# Altium PCB Board_Final.PcbDoc
Units mil, origin at the board's own origin, x right, y up, seen from the top; angles counter-clockwise.
Board outline 5593.76 x 2194.62 mil, 2 copper layers (Top Layer, Bottom Layer); 47 components, 44 nets, 216 pads, 73 vias.
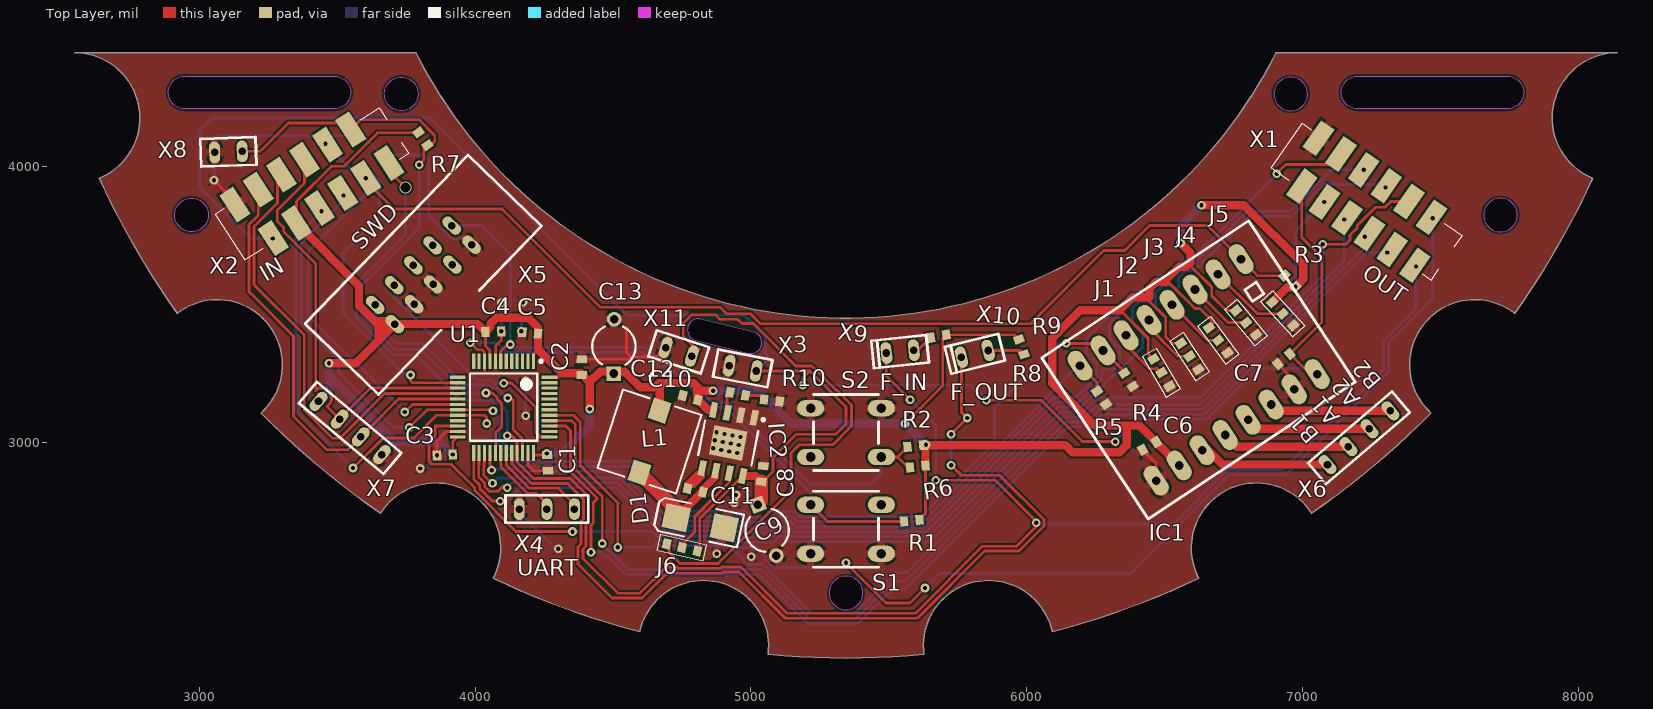
[diagram p0: Top Layer view]
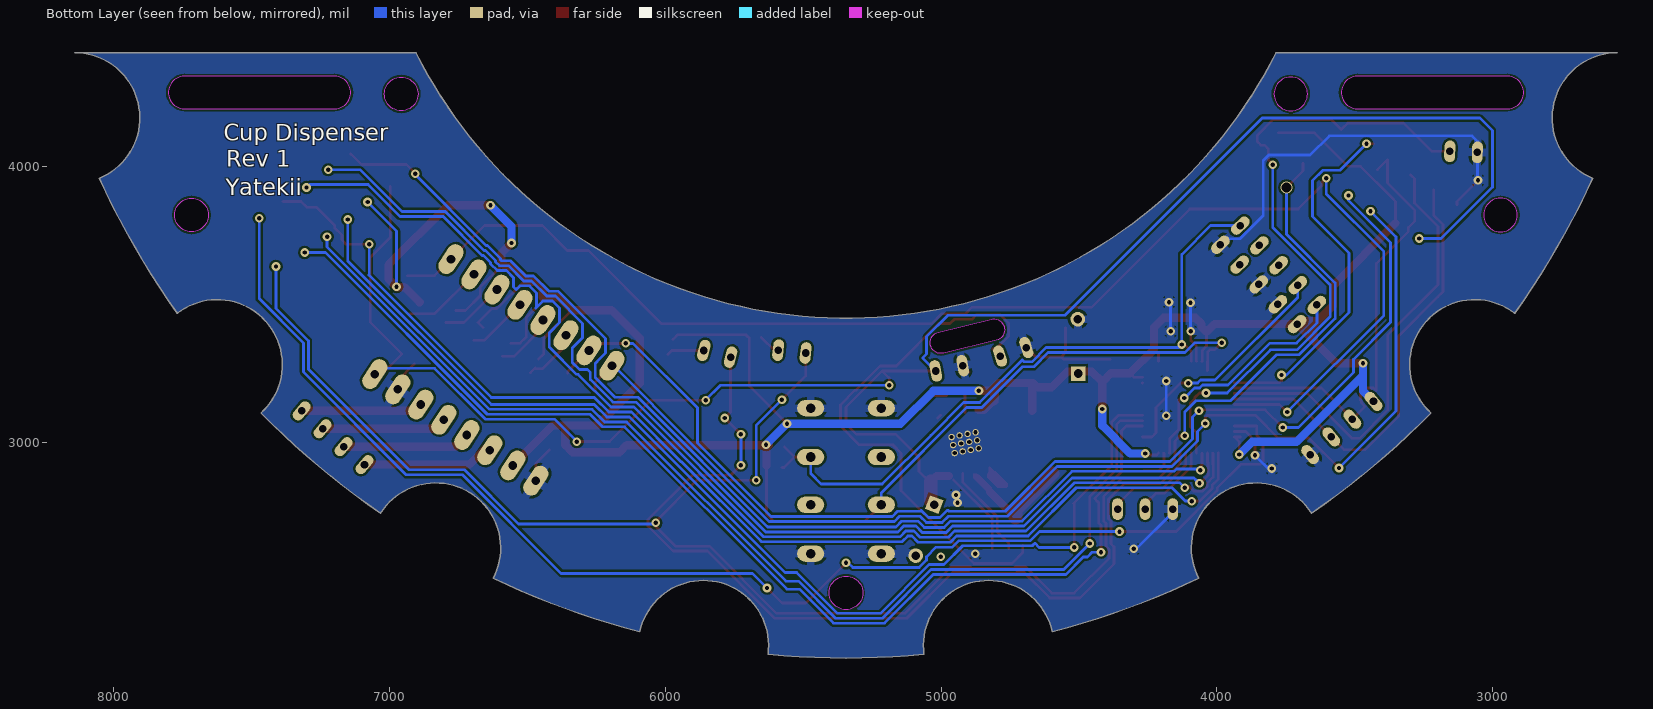
[diagram p1: Bottom Layer view, seen from below]

## Layer stack, top to bottom
Top Solder: solder mask 0.4, Solder Resist, Dk 3.5
Top Layer: signal copper 1.4
Dielectric 1: dielectric 12.6, FR-4, Dk 4.8
Bottom Layer: signal copper 1.4
Bottom Solder: solder mask 0.4, Solder Resist, Dk 3.5

## Board outline
3223.86,3107.03 ccw(c5345,5195) 3657.09,2743.51 cw(c3856.81,2617.38) 4065.91,2507.48 ccw(c5345,5195) 4597.34,2314.06 cw(c4828.16,2263.84) 5062.23,2232.08 ccw(c5345,5195) 5627.77,2232.08 cw(c5861.84,2263.84) 6092.66,2314.06 ccw(c5345,5195) 6624.09,2507.48 cw(c6833.19,2617.38) 7032.91,2743.51 ccw(c5345,5195) 7466.14,3107.03 cw(c7625.04,3281.82) 7769.58,3468.66 ccw(c5345,5195) 8052.34,3958.42 cw(c8141.88,4177.02) 8141.88,4413.24 6904.08,4413.24 cw(c5345,5195) 3785.92,4413.24 2548.12,4413.24 cw(c2548.12,4177.02) 2637.66,3958.42 ccw(c5345,5195) 2920.42,3468.66 cw(c3064.96,3281.82)
cut-out: 2946.99,4209.99 cw(c2946.99,4269.05) 2946.99,4328.1 3490.17,4328.1 cw(c3490.17,4269.05) 3490.17,4209.99
cut-out: 3732.28,4202.87 cw(c3732.28,4263.9) 3671.26,4263.9 cw(c3732.28,4263.9) 3732.28,4324.92 cw(c3732.28,4263.9) 3793.31,4263.9 cw(c3732.28,4263.9)
cut-out: 4799.9,3370.57 4991.18,3324.04 ccw(c5000.48,3362.3) 5009.79,3400.55 4818.52,3447.08 ccw(c4809.21,3408.82)
cut-out: 2971.95,3763.9 cw(c2971.95,3824.92) 2910.93,3824.92 cw(c2971.95,3824.92) 2971.95,3885.94 cw(c2971.95,3824.92) 3032.98,3824.92 cw(c2971.95,3824.92)
cut-out: 5283.98,2454.84 ccw(c5345,2454.84) 5345,2393.82 ccw(c5345,2454.84) 5406.02,2454.84 ccw(c5345,2454.84) 5345,2515.86 ccw(c5345,2454.84)
cut-out: 6896.69,4263.9 ccw(c6957.72,4263.9) 6957.72,4202.87 ccw(c6957.72,4263.9) 7018.74,4263.9 ccw(c6957.72,4263.9) 6957.72,4324.92 ccw(c6957.72,4263.9)
cut-out: 7199.83,4209.99 cw(c7199.83,4269.05) 7199.83,4328.1 7743.01,4328.1 cw(c7743.01,4269.05) 7743.01,4209.99
cut-out: 7657.02,3824.92 ccw(c7718.05,3824.92) 7718.05,3763.9 ccw(c7718.05,3824.92) 7779.07,3824.92 ccw(c7718.05,3824.92) 7718.05,3885.94 ccw(c7718.05,3824.92)

## Design rules (kind name [scope] priority, off if disabled: settings)
Clearance [All] p1: gap=7.87
ComponentClearance [All] p1 off: gap=5 collisioncheckmode=3 verticalgap=7.87 showdistances=FALSE
PlaneConnect [All] p1: planeconnectstyle=Relief reliefexpansion=20 reliefentries=4 reliefconductorwidth=30 reliefairgap=10
PolygonConnect [InComponent('IC2')] p1: connectstyle=Direct reliefconductorwidth=10 reliefentries=4 polygonreliefangle="90 Angle" airgapwidth=10
PolygonConnect PolygonConnect_1 [All] p2: connectstyle=Relief reliefconductorwidth=30 reliefentries=4 polygonreliefangle="90 Angle" airgapwidth=10
RoutingVias [All] p1: holewidth=35.43 width=23.62 viastyle="Through Hole" minholewidth=15.75 minwidth=23.62 maxholewidth=35.43 maxwidth=43.31
SolderMaskExpansion [All] p1: expansion=4
UnpouredPolygon [All] p1: allowunpoured=FALSE
Width [All] p1: maxlimit=100 minlimit=10 preferedwidth=10
27 further rules are at their usual default settings.

## Classes and differential pairs
component class FillLevelSensor: R8 R9 X9 X10
component class Power: C8 C9 C10 C11 C12 C13 D1 IC2 J6 L1 R10 X11
component class Schematic: C1 C2 C3 C4 C5 C6 C7 IC1 J1 J2 J3 J4 J5 R1 R2 R3 R4 R5 R6 R7 S1 S2 U1 X1 X2 X3 X4 X5 X6 X7 X8

## Components (designator, comment, footprint, x,y, rotation, side; value= is the part's Value field where it differs from the comment)
C1 "Cap" "Res 0603" 4262.96,2926.46 r92.68 top
C2 "Cap" "Res 0603" 4386.91,3273.36 r268.96 top
C3 "Cap" "Res 0603" 3890.34,2955.03 r3.28 top
C4 "Cap" "Res 0603" 4066.08,3402.03 r182.28 top
C5 "Cap" "Res 0603" 4199.75,3397.32 r354.95 top
C6 "Cap" "Res 0603" 6445.38,2987.97 r30.24 top
C7 "Cap" "Res 0603" 6932.73,3302.81 r40 top
C8 "Cap" "Res 0603" 5041.09,2886.58 r262.5 top
C9 "Cap2" CAPR5-4X5 5058.69,2682.13 r290 top
C10 "Cap" "Res 0603" 4952.57,3176.1 r169 top
C11 "Cap" "Res 0603" 4798.21,2826.59 r347 top
C12 "Cap" "Res 0603" 4780.8,3162.36 r344.49 top
C13 "Cap2" CAPR5-4X5 4503.53,3348.57 r89.5 top
D1 "D Schottky" SMB 4816.71,2709.59 r168 top
IC1 "A4988 Stepper" "A4988 Stepper" 6623.58,3263.28 r33.5 top
IC2 "IFX91041EJV50" IFX91041EJV50 4918.01,2998.32 r259 top
J1 "VCC to GND Jumper" "VCC to GND Jumper" 6488.76,3253.29 r120.5 top
J2 "VCC to GND Jumper" "VCC to GND Jumper" 6590.98,3312.52 r123.5 top
J3 "VCC to GND Jumper" "VCC to GND Jumper" 6694.82,3370.82 r126.5 top
J4 "VCC to GND Jumper" "VCC to GND Jumper" 6795.96,3434.85 r129.5 top
J5 "VCC to GND Jumper" "VCC to GND Jumper" 6928.64,3466.76 r132.5 top
J6 "VCC to GND Jumper" "VCC to GND Jumper" 4750.39,2619.45 r347 top
L1 "22 µH" "WE-PD 7345 Plastic Base" 4632.8,3003.08 r72 top
R1 "10k" "Res 0603" 5583.63,2716.7 r5.5 top
R2 "10k" "Res 0603" 5596.54,2987.24 r6.5 top
R3 "10k" "Res 0603" 6955.2,3584.8 r315 top
R4 "10k" "Res 0603" 6369.21,3227.52 r122.5 top
R5 "10k" "Res 0603" 6271.36,3162.28 r124.5 top
R6 "10k" "Res 0603" 5605.01,2912.92 r6.5 top
R7 "10k" "Res 0603" 3811.65,4101.27 r125.5 top
R8 "10k" "Res 0603" 5680.34,3385.66 r10.5 top
R9 "10k" "Res 0603" 5981.27,3347.15 r109 top
R10 "22k" "Res 0603" 5076.03,3152 r172.5 top
S1 "Taster" TASTER 5345,2685.56 r90 top
S2 "Taster" TASTER 5345,3035.95 r270 top
U1 "STM32F042C6T6" LQFP48 4103.23,3128.35 r270 top
X1 "OUT" "12p Wurth 690 367 28 12 76" 7232.92,3873.07 r325 top
X2 "IN" "12p Wurth 690 367 28 12 76" 3408.8,3937.62 r33 top
X3 "2p Connector" "2p 2.54 pitch" 4970.59,3268.85 r349 top
X4 "UART" "3p 2.54 pitch" 4260.26,2758.64 r180 top
X5 "Wannenstecker 10p" "Wannenstecker 10p" 3812.38,3607.92 r46 top
X6 "4p Connector" "4p 2.54 pitch Motor Connector" 7204.87,3017.37 r40.5 top
X7 "LEDs" "4p 2.54 pitch" 3547.22,3052.49 r320 top
X8 "2p Connector" "2p 2.54 pitch" 3105.56,4053.95 r182 top
X9 "2p Connector" "2p 2.54 pitch, diode" 5541.05,3329.69 r6 top
X10 "2p Connector" "2p 2.54 pitch, diode" 5812.08,3321.65 r14 top
X11 "2p Connector" "2p 2.54 pitch" 4738.65,3328.84 r342 top

## Footprints (in the part's own frame and the unit in brackets; to place one, negate y for a bottom-side part, rotate by r counter-clockwise, add the part's x,y. Pads: shape width x height; smd on the part's side, far side on the other; paste and mask are expansions set on the pad)
"2p 2.54 pitch" [mm]
  oval 1x2 hole 0.7: 1(1.27,0) 2(-1.27,0)
  silkscreen extent -2.54,-1.27 2.54,1.27
"2p 2.54 pitch, diode" [mm]
  oval 1x2 hole 0.7: 1(1.27,0) 2(-1.27,0)
  silkscreen extent -2.54,-1.27 2.54,1.27
"3p 2.54 pitch" [mm]
  oval 1x2 hole 0.7: 1(2.54,0) 2(0,0) 3(-2.54,0)
  silkscreen extent -3.81,-1.27 3.81,1.27
"4p 2.54 pitch" [mm]
  oval 1x2 hole 0.7: 1(3.81,0) 2(1.27,0) 3(-1.27,0) 4(-3.81,0)
  silkscreen extent -5.08,-1.27 5.08,1.27
"4p 2.54 pitch Motor Connector" [mm]
  oval 1x2 hole 0.7: 1(3.81,0) 2(1.27,0) 3(-1.27,0) 4(-3.81,0)
  silkscreen extent -5.08,-1.27 5.08,1.27
"12p Wurth 690 367 28 12 76" [mm]
  rect 1.5x3 smd: 1(-5.715,-2.25) 2(-6.985,2.25) 3(-3.175,-2.25) 4(-4.445,2.25) 5(-0.635,-2.25) 6(-1.905,2.25) 7(1.905,-2.25) 8(0.635,2.25) 9(4.445,-2.25) 10(3.175,2.25) 11(6.985,-2.25) 12(5.715,2.25)
  silkscreen extent -9,-2.5 9,2.5
"A4988 Stepper" [mm] "Stepper Driver"
  oval 1.5x3 hole 0.8: 1(8.89,6.35) 2(6.35,6.35) 3(3.81,6.35) 4(1.27,6.35) 5(-1.27,6.35) 6(-3.81,6.35) 7(-6.35,6.35) 8(-8.89,6.35) 9(-8.89,-6.35) 10(-6.35,-6.35) 11(-3.81,-6.35) 12(-1.27,-6.35) 13(1.27,-6.35) 14(3.81,-6.35) 15(6.35,-6.35) 16(8.89,-6.35)
  silkscreen extent -11.43,-8.89 11.43,8.89
CAPR5-4X5 [mm] "Capacitor; 2 Leads"
  rect 1.35x1.35 hole 0.8: 1(-2.5,0)
  round 1.35 hole 0.8: 2(2.5,0)
  silkscreen extent -1.69,-2 1.82,2
IFX91041EJV50 [mm] "IFX91041EJV50, Buck Converter, max in 40V, fixed out 5V"
  rect 1.45x0.6 smd: 1(-2.725,1.905) 2(-2.725,0.635) 3(-2.725,-0.635) 4(-2.725,-1.905) 5(2.725,-1.905) 6(2.725,-0.635) 7(2.725,0.635) 8(2.725,1.905)
  round 0.6 hole 0.4: 9(-0.75,0.25) 9(-0.75,-1.25) 9(-0.75,-0.5) 9(-0.75,1) 9(0,0.25) 9(0,-1.25) 9(0,-0.5) 9(0,1) 9(0.75,0.25) 9(0.75,-0.5) 9(0.75,-1.25) 9(0.75,1)
  rect 2.75x3.1 smd: 9(0,0)
  silkscreen extent -2.85,-2.5 1.6,2.88, body extent -2,-2.5 2,2.5, height 1.7
LQFP48 [mm] "LQFP, 48-Leads, Body 7.00x7.00mm, STM32F042C6T6"
  rect 1.45x0.3 smd: 1(-4.225,2.75) 2(-4.225,2.25) 3(-4.225,1.75) 4(-4.225,1.25) 5(-4.225,0.75) 6(-4.225,0.25) 7(-4.225,-0.25) 8(-4.225,-0.75) 9(-4.225,-1.25) 10(-4.225,-1.75) 11(-4.225,-2.25) 12(-4.225,-2.75) 25(4.225,-2.75) 26(4.225,-2.25) 27(4.225,-1.75) 28(4.225,-1.25) 29(4.225,-0.75) 30(4.225,-0.25) 31(4.225,0.25) 32(4.225,0.75) 33(4.225,1.25) 34(4.225,1.75) 35(4.225,2.25) 36(4.225,2.75)
  rect 0.3x1.45 smd: 13(-2.75,-4.225) 14(-2.25,-4.225) 15(-1.75,-4.225) 16(-1.25,-4.225) 17(-0.75,-4.225) 18(-0.25,-4.225) 19(0.25,-4.225) 20(0.75,-4.225) 21(1.25,-4.225) 22(1.75,-4.225) 23(2.25,-4.225) 24(2.75,-4.225) 37(2.75,4.225) 38(2.25,4.225) 39(1.75,4.225) 40(1.25,4.225) 41(0.75,4.225) 42(0.25,4.225) 43(-0.25,4.225) 44(-0.75,4.225) 45(-1.25,4.225) 46(-1.75,4.225) 47(-2.25,4.225) 48(-2.75,4.225)
  silkscreen extent -4.35,-3.1 3.1,3.58, body extent -3.5,-3.5 3.5,3.5, height 1.6
"Res 0603" [mm] "Chip Resistor, 2-Leads, 0603, IPC Medium Density"
  rect 0.75x0.95 smd: 1(-0.725,0) 2(0.725,0)
  body extent -0.85,-0.45 0.85,0.45, height 0.55
SMB [mm] "DO-214-AA/SMB; 2 C-Bend Leads; Body 5.3 x 3.6 mm, inc. leads (LxW)"
  rect 2.3x2.3 smd: 1(-2.25,0) 2(2.25,0)
  silkscreen extent -3.8,-1.55 4.1,1.55
TASTER [mm]
  oval 1.5x2.5 hole 0.9: 1(2.25,3.25) 2(-2.25,3.25) 3(-2.25,-3.25) 4(2.25,-3.25)
  silkscreen extent -3.5,-3 3.5,3
"VCC to GND Jumper" [mm]
  rect 0.75x0.95 smd: 1(-1.45,0) 2(1.45,0) 3(0,0)
  silkscreen extent -2.18,-0.75 2.18,0.75
"Wannenstecker 10p" [mm] "Connector, 10p"
  oval 1x2 hole 0.7: 1(-5.08,-1.27) 2(-5.08,1.27) 3(-2.54,-1.27) 4(-2.54,1.27) 5(0,-1.27) 6(0,1.27) 7(2.54,-1.27) 8(2.54,1.27) 9(5.08,-1.27) 10(5.08,1.27)
  silkscreen extent -10.8,-4.7 10.8,4.7
"WE-PD 7345 Plastic Base" [mm] "SMD Inductor, 2-Leads, Body 7,3x7,3mm"
  rect 2x1.7 smd: 1(-3,0) 2(3,0)
  silkscreen extent -3.8,-3.8 3.8,3.8, body extent -3.65,-3.65 3.65,3.65, height 4.09

## Part data
C1 C2 C3 C4 C5 C6 C7 C8 C9 C10 C11 C12 C13: "Capacitor"
D1: "Schottky Diode"
L1: library part "WE-PD 7345, M Plastic Base, 7447779122", "SMD-Shielded Power Inductor WE-PD, L=22 µH"
R1 R2 R3 R4 R5 R6 R7 R8 R9 R10: library part Res
X1 X2: library part "12p Connector"
X4: library part "3p Connector"
X7: library part "4p Connector"

## Via types
v1: diameter 31.5, hole 15.75, Top Layer to Bottom Layer, 72 vias
v2: diameter 43.31, hole 35.43, Top Layer to Bottom Layer, 1 vias

## Nets (pads, with @x,y where several pads share a name; then routed paths per layer and width w, separated by ;. In a path a pad name is that pad's centre, name@x,y a point inside that pad or via, vN(x,y) a via of type N, cw(c..) or ccw(c..) an arc to the next point about the centre after c; other vN are vias at no path point)
1A_1: IC1.12 X6.3 | length 464.5
  Top Layer w30: IC1.12 6762.18,2984.9 X6.3
1B_1: IC1.11 X6.4 | length 484.1
  Top Layer w10: IC1.11 6646.37,2981.91 IC1.11@6648.61,2981.91
  Top Layer w30: IC1.11@6648.61,2981.91 6710.57,2919.95 X6.4
2A_1: IC1.13 X6.2 | length 407.1
  Top Layer w30: IC1.13@6835.82,3049.84 X6.2
2B_1: IC1.14 X6.1 | length 409.5
  Top Layer w30: IC1.14@6909.45,3114.79 X6.1
5V: C1.2 C2.2 C3.2 C4.2 C5.2 C6.2 C12.2 C13.1 IC1.10 IC2.4 J1.2 J2.2 J3.2 J4.2 J5.2 L1.2 R1.2 R2.2 R3.2 R6.2 R7.2 R8.2 R9.2 U1.1 U1.9 U1.24 U1.36 U1.48 X1.3 X2.3 X5.1 X7.4 | length 10995.8
  Top Layer w10: X2.3 3352.21,3874.22 3366.27,3888.29 3366.27,3888.49 3479.29,4001.5 3524.89,4001.5 3646.34,4122.95 R7.2@3777.03,4122.95 ; U1.24@3915.15,3020.09 U1.24 3918.84,3002.03 v1(3918.84,2956.66) ; C4.2 4037.56,3349.71 4053.12,3334.16 4053.12,3295.6 U1.9 ; U1.36 4218.54,2954.97 C1.2 4261.71,2954.89 4261.71,2958.29 v1(4260,2960) ; U1.1 4211.5,3321.32 4228.18,3338 ; U1.48 4300.5,3236.62 4315.03,3251.15 ; v1(4863.04,3187.48) v1@4864.86,3185.66 ; v1(5558.83,3068.17) 5695.41,3204.75 5695.41,3377.86 R8.2 5955.25,3390.86 R9.2 ; R1.2 5633.37,2740.77 R6.2 ; R2.2 R2.2@5633.37,2982 ; 6339.04,3479.91 6440.8,3378.14 6440.8,3321.45 J1.2 ; 6444.19,3512.97 6504.39,3452.77 6504.39,3382.8 6527.06,3360.13 J2.2 ; C6.2@6470.04,2999.87 C6.2 ; 6505.81,3590.3 6610.39,3485.72 6628.16,3485.72 6679.02,3434.86 J3.2 ; IC1.10 IC1.10@6576.45,2893.47 ; 6593.81,3652.63 6593.81,3640.51 6671.17,3563.16 6671.17,3531.98 6724.25,3478.9 J4.2 ; R3.2@6974.09,3563.33 R3.2
  Top Layer w30: X2.3 3579.14,3568.31 3579.14,3496.36 3634.57,3440.94 3697.8,3440.94 X5.1 ; v1(3470.21,3287.2) 3567.29,3287.2 3650.72,3370.63 ; 3660.97,3420.41 3678.41,3402.97 3678.41,3398.32 ; v1(4415.59,3121.69) 4415.59,3218.83 ; L1.2 4669.3,3200 ; C12.2@4806.12,3156.91 4806.12,3201.47 ; C12.2@4807.1,3148.58 4807.1,3174.47 4820.11,3187.48 ; C12.2 4845.08,3117.95 IC2.4 ; v1(4863.04,3187.48) 4820.11,3187.48 ; R2.2 6140.03,2990.47 6165.91,2964.59 6336.84,2964.59 6362.63,2990.38 6362.63,3061.49 ; R6.2 R2.2@5633.37,2982 ; 6505,3582.01 6469.33,3582.01 6444.19,3556.87 6444.19,3526.81 6385.94,3526.81 6339.04,3479.91 6195.15,3479.91 6093.34,3378.1 6093.34,3214.27 6246.12,3061.49 6362.63,3061.49 ; 6505.81,3590.3 6552.72,3637.2 6578.38,3637.2 6593.81,3652.63 6593.81,3687.69 v1(6558.05,3723.45) ; IC1.10 6470.04,2999.87 6408.42,3061.49 6362.63,3061.49 ; v1(6634.22,3859.98) 6787.75,3859.98 7003.06,3644.66 7003.06,3592.3 R3.2 ; J5.2 6892.1,3508.84 6946.58,3563.33 R3.2@6974.09,3563.33 ; 3650.72,3370.63 3650.72,3424.04 3645.44,3429.32 X5.1 ; 3650.72,3370.63 3678.41,3398.32 ; 3678.41,3398.32 X5.1 ; X5.1 4009.13,3429.32 C4.2 4056.23,3419.56 4056.23,3430.74 4077.71,3452.21 4193.78,3452.21 4228.18,3417.81 C5.2 4228.18,3338 4315.03,3251.15 4383.27,3251.15 4415.59,3218.83 ; 4415.59,3218.83 4454.34,3257.58 4542.5,3257.58 4599.72,3200.36 4651.37,3200.36 ; 4651.37,3200.36 4651.72,3200 4669.3,3200 ; 4651.37,3200.36 4666.47,3215.46 4669.3,3215.46 ; 4669.3,3200 4669.3,3215.46 ; 4669.3,3215.46 4792.13,3215.46 4806.12,3201.47 ; 4806.12,3201.47 4820.11,3187.48
  Bottom Layer w10: v1(6974.68,3565.32) 6974.68,3767.17 v1(7079.71,3872.2)
  Bottom Layer w30: X7.4 3470.21,3186.8 3470.21,3243.29 ; v1(3470.21,3287.2) 3470.21,3243.29 ; v1(3918.84,2956.66) 3873.13,3002.38 3711.12,3002.38 3470.21,3243.29 ; v1(4260,2960) 4314.76,2960 4415.59,3060.83 v1(4415.59,3121.69) ; v1(4863.04,3187.48) 5028.3,3187.48 5147.6,3068.17 v1(5558.83,3068.17) v1(5635.03,2991.97) ; v1(6558.05,3723.45) 6558.05,3783.81 v1(6634.22,3859.98)
/EN_1: IC1.1 R3.1 U1.18 X2.9 | length 5061.9
  Top Layer w10: v1(3603.81,3958.64) 3618.83,3943.62 3618.83,3932.9 3705.36,3846.36 4098.21,3846.36 4454.52,3490.06 4889.22,3490.06 4912.34,3466.94 4998.49,3466.94 5034.99,3430.43 6013.07,3430.43 6279.06,3696.42 6355.69,3696.42 6445.81,3786.54 6655.84,3786.54 IC1.1 6837.39,3604.99 R3.1 ; v1(3745.45,3110.42) 3773.22,3138.2 U1.18
  Bottom Layer w10: v1(3603.81,3958.64) 3603.81,3902 3394.89,3693.08 3394.89,3460.98 v1(3745.45,3110.42)
/EN_2: U1.39 X1.9 | length 4124.3
  Top Layer w10: U1.39 4328.8,3059.46 4345.66,3042.6 4345.66,2894.06 4443.41,2796.31 4428.57,2781.47 4428.57,2708.37 4420.2,2700 v1(4420.2,2602.33)
  Bottom Layer w10: v1(4420.2,2602.33) 4452.1,2602.33 4469.43,2585 4484.63,2585 4547.98,2521.65 5028.72,2521.65 5205.48,2344.9 5390.54,2344.9 5513.74,2468.1 5559,2468.1 6147.75,3056.85 6227.1,3056.85 6272.76,3102.51 6645.8,3102.51 7232.2,3688.92 v1(7307.76,3688.92)
BLANK_1: U1.16 X2.6 | length 1635.8
  Top Layer w10: X2.6 3283.59,3956.99 3283.59,3867.97 3198.54,3782.92 3198.54,3571.98 3380.98,3389.54 3380.98,3117.69 3483.65,3015.02 3509.26,3015.02 3671.81,3177.57 U1.16
BLANK_2: U1.27 X1.6 | length 4104.4
  Top Layer w10: U1.27 4034.34,2928.8 4032.53,2926.99 4032.53,2912.34 4031.29,2911.1 4031.29,2882.25 4061.49,2852.04 v1(4063.48,2852.04)
  Bottom Layer w10: v1(4063.48,2852.04) 4063.74,2852.04 4075,2863.3 ; 5638.75,2678.12 5636.57,2675.94 5156.62,2675.94 5135.59,2696.97 5091.36,2696.97 5068.46,2674.06 4981.6,2674.06 4958.7,2696.97 4699.36,2696.97 4524.8,2871.53 4083.24,2871.53 4075,2863.3 ; 5638.78,2678.12 6106.89,3146.22 6190.08,3146.22 6272.1,3228.24 6272.1,3254.48 6282.57,3264.95 6311.73,3264.95 6337.61,3290.84 6337.61,3342.38 6300.02,3379.97 6300.02,3431.89 6398.98,3530.84 6430.09,3530.84 6485.28,3586.04 6513.48,3586.04 6568.67,3641.23 6601.86,3641.23 6615.7,3655.07 6615.7,3660.06 6652.06,3696.42 6657.06,3696.42 6798.07,3837.44 6954.69,3837.44 7105.9,3988.65 v1(7222.29,3988.65) ; 4075,2863.3 4071.83,2860.12 4074.33,2857.61 4075,2858.28 4075,2863.3
DIR_1: IC1.8 R5.2 U1.20 X2.5 | length 4354.8
  Top Layer w10: X2.5 3447.43,3838.35 v1(3443.05,3838.35) ; v1(3557.65,2907.29) 3667.08,3016.72 3778.19,3016.72 3860.29,3098.83 U1.20 4033.65,3098.83 4042.05,3090.43 v1(4042.05,3068.77) ; IC1.8 6255.2,3217.11 R5.2
  Bottom Layer w10: v1(3443.05,3838.35) 3350.54,3745.84 3350.54,3114.4 v1(3557.65,2907.29) ; v1(4042.05,3068.77) 4070.55,3040.27 4070.55,3005.34 4162.48,2913.41 4579.31,2913.41 4760.01,2732.71 4973.51,2732.71 4996.41,2709.81 5053.65,2709.81 5076.56,2732.71 5150.4,2732.71 5169.25,2713.86 5623.98,2713.86 5901.36,2991.25 ; 5901.36,2991.28 6188.65,3278.57 IC1.8
DIR_2: U1.41 X1.5 | length 4068.5
  Top Layer w10: U1.41 4356.71,3098.83 4381.4,3074.13 4381.4,2916.98 4520,2778.38 4517.71,2776.1 v1(4517.71,2619.6) ; v1(7151.59,3808.75) X1.5@7157.68,3814.84
  Bottom Layer w10: v1(4517.71,2619.6) 4644.82,2619.6 4660.22,2635 4669.75,2625.47 4921.6,2625.47 4989.67,2557.4 5043.53,2557.4 5220.28,2380.65 5375.73,2380.65 5523.78,2528.7 5566.36,2528.7 6130.26,3092.6 6212.29,3092.6 6257.95,3138.26 6630.99,3138.26 7151.59,3658.86 v1(7151.59,3808.75)
EST_1: R7.1 U1.29 X2.12 X8.2 | length 2393.7
  Top Layer w10: X8.2@3161.99,4055.69 3220.56,4055.69 3323.34,4158.47 3525.23,4158.47 X2.12 3585.36,4170.56 3796.75,4170.56 3853.93,4113.38 3853.93,4091.87 3840.08,4078.03 R7.1 3813.65,4063.46 3813.65,4023.67 v1(3797.65,4007.68) ; v1(4039.87,3179.73) 4063.51,3179.73 4080.29,3162.95 4080.29,3157.54 4097.15,3140.69 4097.15,3058.58 4074.61,3036.04 4074.61,2962.92 U1.29
  Bottom Layer w10: v1@3790.76,4007.68 v1(3797.65,4007.68) 3797.65,3779.87 3589.14,3571.36 3589.14,3456.73 3709.76,3336.12 3806.39,3336.12 3962.79,3179.73 v1(4039.87,3179.73)
EST_2: U1.22 X1.12 | length 4909.1
  Top Layer w10: U1.22 3855.69,3059.46 3855.69,3025.12 3833.16,3002.6 3833.16,2930.69 3842.85,2921 3913.22,2921 3999.11,2835.11 3999.11,2825.38 4147.43,2677.06 4215.77,2677.06 4215.73,2677.02 v1(4353.14,2677.02) ; v1(5345,2563.51) 5490.76,2417.75 5576.72,2417.75 v1(5631.18,2472.21)
  Bottom Layer w10: v1(4353.14,2677.02) 4643.48,2677.02 4677.15,2643.34 4936.49,2643.34 4959.39,2620.44 5017.98,2620.44 5052.91,2585.51 5052.91,2573.3 5079.64,2546.57 5320.19,2546.57 5337.13,2563.51 v1(5345,2563.51) ; v1(5631.18,2472.21) 5684.33,2525.36 6378,2525.36 6735.88,2883.24 6940.06,2883.24 7312.28,3255.46 7312.28,3361.22 7472.71,3521.65 v1(7472.71,3813.25)
FILLED: U1.33 X1.11 X2.11 X9.2 | length 6937.4
  Top Layer w10: X2.11 3687.68,3984.55 v2(3747.74,3924.48) ; v1(4117.05,3024.6) 4133.14,3024.6 4152.45,3005.29 U1.33 4153.35,2962.01 4153.35,2928.14 4212.04,2869.45 4344.99,2869.45 4410.7,2803.74 4410.7,2715.78 4402.32,2707.4 4402.32,2624.93 4391.58,2614.18 4391.58,2579.61 4517.56,2453.62 4598.5,2453.62 4693.11,2548.23 4731.69,2548.23 4736.17,2543.74 4888.96,2543.74 4893.44,2548.23 4964.42,2548.23 5132,2380.65 5596.49,2380.65 5839.9,2624.05 5963.99,2624.05 6036.66,2696.72 6036.66,2711.91 5885.15,2863.43 v1(5670.69,2863.43) ; X9.2 5491.33,3241.5 v1(5577.38,3155.44) ; X1.11 v1(7412.02,3638.13)
  Bottom Layer w10: v2(3747.74,3924.48) 3747.74,3755.23 3571.27,3578.76 3571.27,3449.33 3702.36,3318.24 3784.64,3318.24 3951.78,3151.1 4051.72,3151.1 4052,3151.38 4075.3,3151.38 4117.05,3109.63 v1(4117.05,3024.6) ; v1(5577.38,3155.44) 5670.69,3062.14 v1(5670.69,2863.43) ; v1(6034.56,2708.53) 6038.57,2704.52 6531.89,2704.52 6728.47,2901.11 6929.91,2901.11 7294.41,3265.61 7294.41,3368.63 7412.02,3486.24 v1(7412.02,3638.13)
GND: C1.1 C2.1 C3.1 C4.1 C5.1 C6.1 C7.1 C8.1 C9.2 C12.1 C13.2 D1.1 IC1.9 IC1.15 IC2.1 IC2.2 IC2.9 J1.1 J2.1 J3.1 J4.1 J5.1 R4.1 R5.1 R10.1 S1.2 S1.3 S2.2 S2.3 U1.8 U1.23 U1.35 U1.47 X1.2 X2.2 X3.2 X4.1 X5.3 X5.5 X5.9 X7.1 X8.1 X11.2 | length 3312.5
  Top Layer w10: v1(3053.16,3950.63) 3129.92,3873.88 X2.2 ; v1(3861.85,2953.25) C3.1 3861.85,3006 3895.61,3039.77 U1.23 U1.23@3935.99,3038.87 ; U1.8 4074.61,3295.6 4074.61,3349.92 4094.61,3369.91 v1(4094.61,3403.16) ; v1(4167.99,3403.16) C5.1 ; v1(4183.75,3096.98) v1@4183.75,3100.05 ; U1.35@4192.72,2961.11 U1.35 4191.82,2916.2 4210.07,2897.95 C1.1 ; U1.47 U1.47@4270.48,3216.03 ; C2.1 4555.92,3301.9 4564.34,3310.33 ; 4549.03,3416.01 4549.03,3325.64 4564.34,3310.33 ; X11.2 4657.13,3310.33 4564.34,3310.33 ; v1@4875.42,2595.96 v1(4876.31,2596.85) ; X3.2@4898.95,3255.83 X3.2 ; v1@4940.57,2778.22 v1(4940.57,2781.45) ; v1@4945.77,2809.28 v1(4946.42,2809.93) ; IC2.1@5002.56,3098.87 IC2.1 ; S2.3@5183.09,3124.53 S2.3 ; S1.2@5206.1,2586.02 S1.2 ; C6.1 6469.7,2924.62 IC1.9 ; C7.1 6970.03,3225.3 IC1.15
  Bottom Layer w10: v1(3053.16,3950.63) 3055.59,3953.06 X8.1 3055.59,4092.14 3075.46,4112.01 3592.33,4112.01 3662.13,4042.21 3811.95,4042.21 3832.18,4021.98 3832.18,3823.07 3916.57,3738.67 3965.66,3738.67 X5.9 ; v1(3800.84,2905.69) 3800.84,2892.24 v1(3861.85,2953.25) ; v1(4094.61,3403.16) 4095.87,3404.43 v1(4095.87,3506.9) ; X4.1 4160.26,2746.77 4292.81,2614.23 v1(4301.77,2614.23) ; v1(4167.99,3403.16) 4167.99,3503.18 v1(4173.93,3509.12) ; v1(4183.26,3222.76) 4183.75,3222.26 v1(4183.75,3096.98) ; v1(4876.31,2596.85) v1@4881,2596.85
  other v1: 5001.52,2586.02
NetC10_1: C10.1 R10.2 | length 73.3
  Top Layer w10: C10.1 5032.81,3170.65 R10.2
NetC10_2: C10.2 IC2.3 | length 77.5
  Top Layer w10: IC2.3 4913.94,3170.94 C10.2
NetC11_1: C11.1 IC2.5 | length 36.9
  Top Layer w10: IC2.5@4812.53,2895.93 IC2.5 IC2.5@4823.92,2886.53
NetC11_2: C11.2 D1.2 IC2.6 L1.1 | length 352.3
  Top Layer w10: L1.1@4596.3,2888.82 L1.1 ; C11.2@4822.23,2820.17 C11.2
  Top Layer w30: D1.2 C11.2@4822.23,2820.17
  Top Layer w50: L1.1@4596.3,2888.82 4730.06,2755.06 D1.2
NetIC1_2: IC1.2 J5.3 | length 293.8
  Top Layer w10: IC1.2 6837.04,3466.76 J5.3
NetIC1_3: IC1.3 J4.3 | length 234.9
  Top Layer w10: IC1.3 6730.37,3434.85 J4.3
NetIC1_4: IC1.4 J3.3 | length 220.8
  Top Layer w10: IC1.4 6655.82,3370.82 J3.3
NetIC1_5: IC1.5 J2.3 | length 216.9
  Top Layer w10: IC1.5 6443.9,3418.01 6549.39,3312.52 J2.3
NetIC1_6: IC1.6 J1.3 | length 209.2
  Top Layer w10: IC1.6 6360.51,3352.7 6445.83,3267.39 6472.2,3267.39 6472.2,3269.84 J1.3
NetIC2_7: IC2.7 J6.3 | length 342.4
  Top Layer w10: J6.3@4754.66,2615.17 4754.66,2633.73 4796.64,2675.7 4796.64,2730.89 4922.08,2856.34 IC2.7
NetJ6_1: J6.1 X11.1 | length 1986.1
  Top Layer w10: J6.1@4704.02,2626.71 4704.02,2601.17 4743.58,2561.62 4881.55,2561.62 5145.24,2825.31 5145.24,2961.66 5175.48,2991.89 5297.73,2991.89 5365,3059.16 5365,3136.67 5311.92,3189.75 5308.91,3189.75 5221.48,3277.18 5162.97,3277.18 5009.02,3431.13 4968.14,3431.13 4952.56,3446.72 4888.52,3446.72 4871.71,3463.53 4786.55,3463.53 4754.5,3431.49 4754.5,3386.16 4800.6,3340.06 4812.87,3340.06 X11.1
NetR8_1: R8.1 X9.1 | length 80.4
  Top Layer w10: X9.1 5606.73,3334.91 R8.1
NetR9_1: R9.1 X10.1 | length 135.6
  Top Layer w10: X10.1 5976.98,3333.74 R9.1
NON: U1.32 X10.2 | length 3453.7
  Top Layer w10: U1.32 4133.67,2962.02 4133.67,2922.55 4204.64,2851.58 4335.36,2851.58 4392.82,2794.11 4392.82,2723.18 4384.45,2714.81 4384.45,2632.33 4373.7,2621.59 4373.7,2559.1 4497.05,2435.75 4605.91,2435.75 4700.31,2530.15 4724.49,2530.15 4728.77,2525.87 4896.36,2525.87 4900.64,2530.15 4957.22,2530.15 5124.6,2362.77 5603.9,2362.77 5847.3,2606.18 5972.68,2606.18 6063.18,2696.68 6063.18,2720.39 5902.27,2881.3 5762.74,2881.3 v1(5726.04,2918) ; v1(5726.04,3030.06) v1(5784.58,3088.6) 5763.56,3109.61 X10.2
  Bottom Layer w10: v1(5726.04,2918) v1(5726.04,3030.06)
NRST: R2.1 R6.1 S2.1 S2.4 U1.7 X5.10 | length 2474.3
  Top Layer w10: U1.7 4093.39,3331.23 4117.37,3355.2 v1(4127.26,3355.2) ; S2.1 5531.54,2947.37 ; R2.1 5531.54,2947.37 ; R6.1 5569.22,2909.69 5531.54,2947.37
  Bottom Layer w10: X5.10@3911.76,3786.56 4023.01,3786.56 4127.26,3682.31 v1(4127.26,3355.2) 4138.01,3344.45 4619.26,3344.45 4671.28,3292.43 4698.74,3292.43 4705.75,3299.44 4860.21,3144.99 4918.28,3144.99 5037.3,3025.97 5213.98,2849.29 5435.19,2849.29 5472.95,2887.06 S2.1
S1: R1.1 S1.1 S1.4 U1.10 | length 2033.1
  Top Layer w10: v1(3983.04,3362.06) 4008.98,3336.11 4025.89,3336.11 4033.43,3328.57 4033.43,3262.63 4035.24,3260.82 4035.24,3293.79 U1.10 ; S1.1 5277.22,2713.97 R1.1
  Bottom Layer w10: v1(3983.04,3362.06) 4079.93,3362.06 4115.41,3326.58 4611.85,3326.58 4663.88,3274.55 4705.37,3274.55 4852.8,3127.12 4907.57,3127.12 5217.05,2817.64 S1.1
SPI1_MOSI: U1.17 X2.4 X7.2 | length 1623.9
  Top Layer w10: X2.4 3213.78,3823.45 3180.67,3790.33 3180.67,3546.62 3198.54,3528.75 3341.98,3385.31 3341.98,3093.91 3461.81,2974.08 3539.25,2974.08 X7.2 3723.05,3157.88 U1.17
SPI1_SCK: U1.15 X2.8 X7.3 | length 1651.8
  Top Layer w10: X2.8@3417.76,3989.28 X2.8 3381.52,3940.62 3282.41,3841.51 3282.41,3803.13 3305.98,3779.56 3305.98,3765.06 3422.01,3649.03 3422.01,3187.45 3432.65,3198.09 3459.09,3198.09 3479.07,3178.11 3479.07,3152.63 3475.44,3149 3475.44,3143.19 3462.9,3130.65 X7.3 3621.54,3197.25 U1.15
SPI1_XLAT: U1.14 X2.10 | length 1343.4
  Top Layer w10: X2.10@3431.79,4083.21 v1(3457.56,4083.21) ; v1(3765.76,3244.8) 3765.76,3224.21 3773.03,3216.94 U1.14
  Bottom Layer w10: v1(3457.56,4083.21) 3553.52,3987.26 3615.67,3987.26 3653.35,3949.57 3653.35,3819.68 3520.97,3687.29 3520.97,3471.2 3747.38,3244.8 v1(3765.76,3244.8)
SPI2_MOSI: U1.28 X1.4 | length 3978.9
  Top Layer w10: U1.28 4054.02,2919.36 4067.02,2906.36 v1(4059.91,2899.25) v1@4065,2904.34 ; v1(6906.75,3974.83) 6906.26,3974.83 6939.18,4007.74 7102.11,4007.74 X1.4
  Bottom Layer w10: v1(4059.91,2899.25) 4059.91,2899.91 4060,2900 4060,2897.96 4067.02,2904.98 4065,2907 4065.4,2907.4 4069.03,2903.78 4146.83,2903.78 4155.08,2895.53 4526.07,2895.53 4706.77,2714.84 4966.1,2714.84 4989.01,2691.93 5061.05,2691.93 5083.96,2714.84 5143,2714.84 5164.03,2693.81 5629.17,2693.81 5631.35,2695.99 ; 5631.38,2695.99 6099.48,3164.09 6182.68,3164.09 6254.22,3235.64 6254.22,3287.19 6238.39,3303.03 6238.57,3303.21 6216.63,3325.15 6216.63,3376.69 6388.66,3548.72 6422.69,3548.72 6477.88,3603.91 6506.07,3603.91 6561.27,3659.1 6594.46,3659.1 6597.83,3662.47 6597.83,3667.47 6644.66,3714.3 6649.65,3714.3 6906.75,3971.39 v1(6906.75,3974.83)
SPI2_SCK: U1.26 X1.8 | length 4280.2
  Top Layer w10: 4014.65,2873.61 4013.41,2874.84 4013.41,2918.5 4014.65,2919.74 U1.26 U1.26@4015.56,2961.11 ; 4015.56,2872.7 4034.86,2853.4 4034.86,2840.19 4051.62,2823.42 4083.51,2823.42 4101.47,2841.38 4112.2,2841.38 v1(4117.19,2836.39)
  Bottom Layer w10: v1(4117.19,2836.39) 4134.45,2853.66 4517.4,2853.66 4691.96,2679.09 4951.29,2679.09 4974.2,2656.19 5075.86,2656.19 5098.77,2679.09 5128.19,2679.09 5149.22,2658.06 5643.97,2658.06 5646.15,2660.24 ; 5646.19,2660.24 6114.29,3128.35 6197.48,3128.35 6316.21,3247.08 6322.05,3247.08 6421,3346.03 6421,3397.58 6383.41,3435.17 6383.41,3487.08 6409.3,3512.97 6444.19,3512.97 6469.3,3487.86 6469.66,3487.86 6466.8,3490.73 6466.8,3542.27 6492.69,3568.16 6527.58,3568.16 6540.83,3554.92 6550.19,3564.28 6550.19,3597.47 6576.08,3623.35 6609.27,3623.35 6633.58,3647.66 6633.58,3652.66 6659.46,3678.55 6664.46,3678.55 6805.48,3819.56 6962.1,3819.56 7077.73,3935.2 7290.57,3935.2 v1(7301.01,3924.75)
SPI2_XLAT: U1.25 X1.10 | length 4239.9
  Top Layer w10: U1.25 3994.97,2868.01 4016.98,2845.99 4016.98,2832.78 4062.26,2787.5 v1(4091.74,2787.5) ; v1(7073.57,3718.66) 7156.92,3718.66 7172.61,3734.35 7172.61,3751.99 7198.69,3778.07 7198.69,3786.47 7265.33,3853.11 7299.85,3853.11 7320.68,3873.93 X1.10
  Bottom Layer w10: v1(4091.74,2787.5) 4115.04,2787.5 4163.32,2835.78 4509.99,2835.78 4684.56,2661.22 4943.89,2661.22 4966.8,2638.31 5083.26,2638.31 5106.17,2661.22 5120.79,2661.22 5141.82,2640.19 5651.38,2640.19 5653.56,2642.37 ; 5653.59,2642.37 5941.45,2930.22 5942.6,2930.22 6122.85,3110.47 6204.89,3110.47 6257.94,3163.53 6630.98,3163.53 7075.3,3607.84 7073.57,3609.57 v1(7073.57,3718.66)
STEP_1: IC1.7 R4.2 U1.19 X2.7 | length 4400.4
  Top Layer w10: X2.7 3528.61,3895.51 v1(3523.18,3895.51) ; v1(3760.99,3054.34) 3825.17,3118.51 U1.19 3937.51,3119.13 4072.9,3119.13 4068.78,3115 v1(4065,3115) ; v1(6143.12,3359.44) 6229.56,3359.44 6255.23,3333.76 IC1.7 6353.87,3257.02 R4.2
  Bottom Layer w10: v1(3523.18,3895.51) 3523.18,3878 3370.32,3725.14 3370.32,3435.92 3504.74,3301.5 3504.74,3253.5 3703.9,3054.34 v1(3760.99,3054.34) ; v1(4065,3115) 4066.2,3115 4088.42,3092.78 4088.42,3012.74 4169.88,2931.28 4586.72,2931.28 4767.41,2750.59 4971.81,2750.59 4974.62,2753.4 4978.1,2753.4 5003.82,2727.68 5046.25,2727.68 ; 5071.97,2753.4 5046.25,2727.68 ; v1(6143.12,3359.44) 6117.06,3359.44 5883.49,3125.87 5883.49,2998.65 5616.57,2731.74 5176.66,2731.74 5157.8,2750.59 5069.15,2750.59 5046.25,2727.68
STEP_2: U1.40 X1.7 | length 4044.1
  Top Layer w10: U1.40 4349.94,3079.14 4363.53,3065.55 4363.53,2901.47 4461.28,2803.71 v1(4461.28,2633.62)
  Bottom Layer w10: v1(4461.28,2633.62) 4555.38,2539.53 5036.13,2539.53 5212.88,2362.77 5383.14,2362.77 5517.7,2497.34 5562.96,2497.34 6140.35,3074.72 6219.69,3074.72 6265.36,3120.39 6638.39,3120.39 7226.56,3708.55 v1(7226.56,3745.71)
SWCLK: U1.37 X5.4 | length 871.5
  Top Layer w10: v1(4104.49,3215.43) 4132.47,3215.43 4220.86,3127.03 4220.86,3035.39 4236.17,3020.09 U1.37 U1.37@4269.57,3020.99
  Bottom Layer w10: X5.4 3706.95,3525.92 4006.65,3226.22 4059.13,3226.22 4069.92,3215.43 v1(4104.49,3215.43)
SWDIO: U1.34 X5.2 | length 893.7
  Top Layer w10: v1@4115.11,3164.7 v1(4118.37,3161.45) 4130.84,3161.45 4138.37,3153.92 4138.37,3046.93 4171.23,3014.08 4171.23,2962.92 U1.34 U1.34@4173.04,2961.11
  Bottom Layer w10: X5.2 3637.48,3433.67 3711.04,3360.12 3807.67,3360.12 3959.44,3208.35 4051.72,3208.35 4062.52,3197.56 4080.76,3197.56 4116.87,3161.45 v1(4118.37,3161.45)
UART_RX: U1.31 X4.3 | length 367.3
  Top Layer w10: U1.31 4113.08,2917.86 4197.23,2833.7 4302.25,2833.7 4360.26,2775.69 X4.3
UART_TX: U1.30 X4.2 | length 299
  Top Layer w10: U1.30 4093.39,2922.34 4094.02,2921.71 4094.02,2911.63 4189.83,2815.83 4221.88,2815.83 4247.08,2790.63 4247.08,2758.64 X4.2
VMOT: C7.2 C8.2 C9.1 IC1.16 IC2.8 J6.2 X1.1 X2.1 X3.1 | length 7391.4
  Top Layer w10: J6.2@4814.51,2616.11 4814.51,2723.49 4954.76,2863.74 ; X3.1 5214.07,3259.31 ; C9.1 C9.1@5037.36,2786.95 ; C8.2@5027.22,2848.13 C8.2 5043.12,2858.28 5080.28,2895.44 5080.28,2945.67 5164.17,3029.56 5307.11,3029.56 5345,3067.45 5345,3128.38 5214.07,3259.31 ; v1(5188.58,3207.45) 5188.58,3233.81 5214.07,3259.31 ; v1(5853.99,3153.56) 6051.68,3153.56 6202.02,3003.21 v1(6320.85,3003.21) ; X1.1 6997.8,3742.54 7070.32,3670.02 7070.32,3436.88 C7.2 7027.77,3247.98 IC1.16
  Top Layer w30: IC2.8 5016.94,2878.7 C8.2
  Top Layer w50: C9.1@5037.36,2786.95 C8.2
  Bottom Layer w10: v1(3266.81,3739.83) 3187.23,3739.83 3001.26,3925.8 3001.26,4131.7 3046.56,4177.01 3835.76,4177.01 4551.36,3461.41 4975.74,3461.41 5053.07,3384.08 5053.07,3320.55 5066.99,3306.62 X3.1 ; v1(5188.58,3207.45) 5800.1,3207.45 v1(5853.99,3153.56) ; v1(6320.85,3003.21) 6402.27,3084.64 6653.2,3084.64 6837.4,3268.84 7032.57,3268.84 IC1.16
pads on no net: U1.2 U1.3 U1.4 U1.5 U1.6 U1.11 U1.12 U1.13 U1.21 U1.38 U1.42 U1.43 U1.44 U1.45 U1.46 X5.6 X5.7 X5.8

## Polygon pours and split planes (outlines as drawn)
GND on Top Layer "Top Layer-No Net1" (solid, pour order 11): 3223.86,3107.03 ccw(c5345,5195) 3657.09,2743.51 cw(c3856.81,2617.38) 4065.91,2507.48 ccw(c5345,5195) 4597.34,2314.06 cw(c4828.16,2263.84) 5062.23,2232.08 ccw(c5345,5195) 5627.77,2232.08 cw(c5861.84,2263.84) 6092.66,2314.06 ccw(c5345,5195) 6624.09,2507.48 cw(c6833.19,2617.38) 7032.91,2743.51 ccw(c5345,5195) 7466.14,3107.03 cw(c7625.04,3281.82) 7769.58,3468.66 ccw(c5345,5195) 8052.34,3958.42 cw(c8141.88,4177.02) 8141.88,4413.24 6904.08,4413.24 cw(c5345,5195) 3785.92,4413.24 2548.12,4413.24 cw(c2548.12,4177.02) 2637.66,3958.42 ccw(c5345,5195) 2920.42,3468.66 cw(c3064.96,3281.82)
GND on Bottom Layer "Top Layer-GND" (solid, pour order 10): 3223.86,3107.03 ccw(c5345,5195) 3657.09,2743.51 cw(c3856.81,2617.38) 4065.91,2507.48 ccw(c5345,5195) 4597.34,2314.06 cw(c4828.16,2263.84) 5062.23,2232.08 ccw(c5345,5195) 5627.77,2232.08 cw(c5861.84,2263.84) 6092.66,2314.06 ccw(c5345,5195) 6624.09,2507.48 cw(c6833.19,2617.38) 7032.91,2743.51 ccw(c5345,5195) 7466.14,3107.03 cw(c7625.04,3281.82) 7769.58,3468.66 ccw(c5345,5195) 8052.34,3958.42 cw(c8141.88,4177.02) 8141.88,4413.24 6904.08,4413.24 cw(c5345,5195) 3785.92,4413.24 2548.12,4413.24 cw(c2548.12,4177.02) 2637.66,3958.42 ccw(c5345,5195) 2920.42,3468.66 cw(c3064.96,3281.82)

## Other copper
Top Layer:
  region net NetC11_1: 4802.06,2895.93 4824.71,2895.93 4833.39,2887.26 4833.39,2872.3 4796.37,2835.28 4762.95,2835.28 4757.91,2840.32 4757.91,2851.79
  region net NetC11_2: 4882.88,2886.87 4871.65,2886.87 4861.84,2882.8 4816.25,2837.21 4816.25,2810.4 4823.52,2810.4 4882.88,2869.76

## Silkscreen, mask and mechanical layers (free items; w line width, h text height)
Top Overlay:
  text "SWD" at 3586.49,3693.09 h60 r45
  text "OUT" at 7211.28,3601.04 h60 r325
  text "IN" at 3241.68,3581.07 h60 r30
  text "F_IN" at 5467.67,3189.3 h60
  text "F_OUT" at 5723.39,3153.4 h60
  text "UART" at 4152.98,2517.67 h60
Bottom Overlay:
  text "Cup Dispenser" at 7600.47,4094.93 h60
  text "Rev 1" at 7591.99,4000.25 h60
  text "Yatekii" at 7593.25,3896.97 h60
Mechanical 1:
  circle w0.5: c7718.05,3824.92 r61.02
  circle w0.5: c5345,2454.84 r61.02
  circle w0.5: c2971.95,3824.92 r61.02
  circle w0.5: c3732.28,4263.9 r61.02
  circle w0.5: c6957.72,4263.9 r61.02
  lines w0.5: 2548.12,4413.24 cw(c2548.12,4177.02) 2637.66,3958.42 ccw(c5345,5195) 2920.42,3468.66 cw(c3064.96,3281.82) 3223.86,3107.03 ccw(c5345,5195) 3657.09,2743.51 cw(c3856.81,2617.38) 4065.91,2507.48 ccw(c5345,5195) 4597.34,2314.06 cw(c4828.16,2263.84) 5062.23,2232.08 ccw(c5345,5195) 5627.77,2232.08 cw(c5861.84,2263.84) 6092.66,2314.06 ccw(c5345,5195) 6624.09,2507.48 cw(c6833.19,2617.38) 7032.91,2743.51 ccw(c5345,5195) 7466.14,3107.03 cw(c7625.04,3281.82) 7769.58,3468.66 ccw(c5345,5195) 8052.34,3958.42 cw(c8141.88,4177.02) 8141.88,4413.24 6904.08,4413.24 cw(c5345,5195) 3785.92,4413.24 2548.12,4413.24 ; 2946.99,4209.99 cw(c2946.99,4269.05) 2946.99,4328.1 3490.17,4328.1 cw(c3490.17,4269.05) 3490.17,4209.99 2946.99,4209.99 ; 4799.9,3370.57 cw(c4809.21,3408.82) 4818.52,3447.08 5009.79,3400.55 cw(c5000.48,3362.3) 4991.18,3324.04 4799.9,3370.57 ; 7199.83,4209.99 cw(c7199.83,4269.05) 7199.83,4328.1 7743.01,4328.1 cw(c7743.01,4269.05) 7743.01,4209.99 7199.83,4209.99

## Text inside footprints (layer, text, board x,y; h text height)
X6: Top Overlay "B1" at 7063.89,3028.47 h60 r130.5; Top Overlay "A1" at 7139.93,3093.41 h60 r130.5; Top Overlay "A2" at 7215.97,3158.35 h60 r130.5; Top Overlay "B2" at 7292.01,3223.3 h60 r130.5